# Altium PCB Double_H_Bridge_v1.0.PcbDoc
Units mm, origin at the board's own origin, x right, y up, seen from the top; angles counter-clockwise.
Board outline 55 x 55 mm, 2 copper layers (Top Layer, Bottom Layer); 107 components, 72 nets, 291 pads, 142 vias.
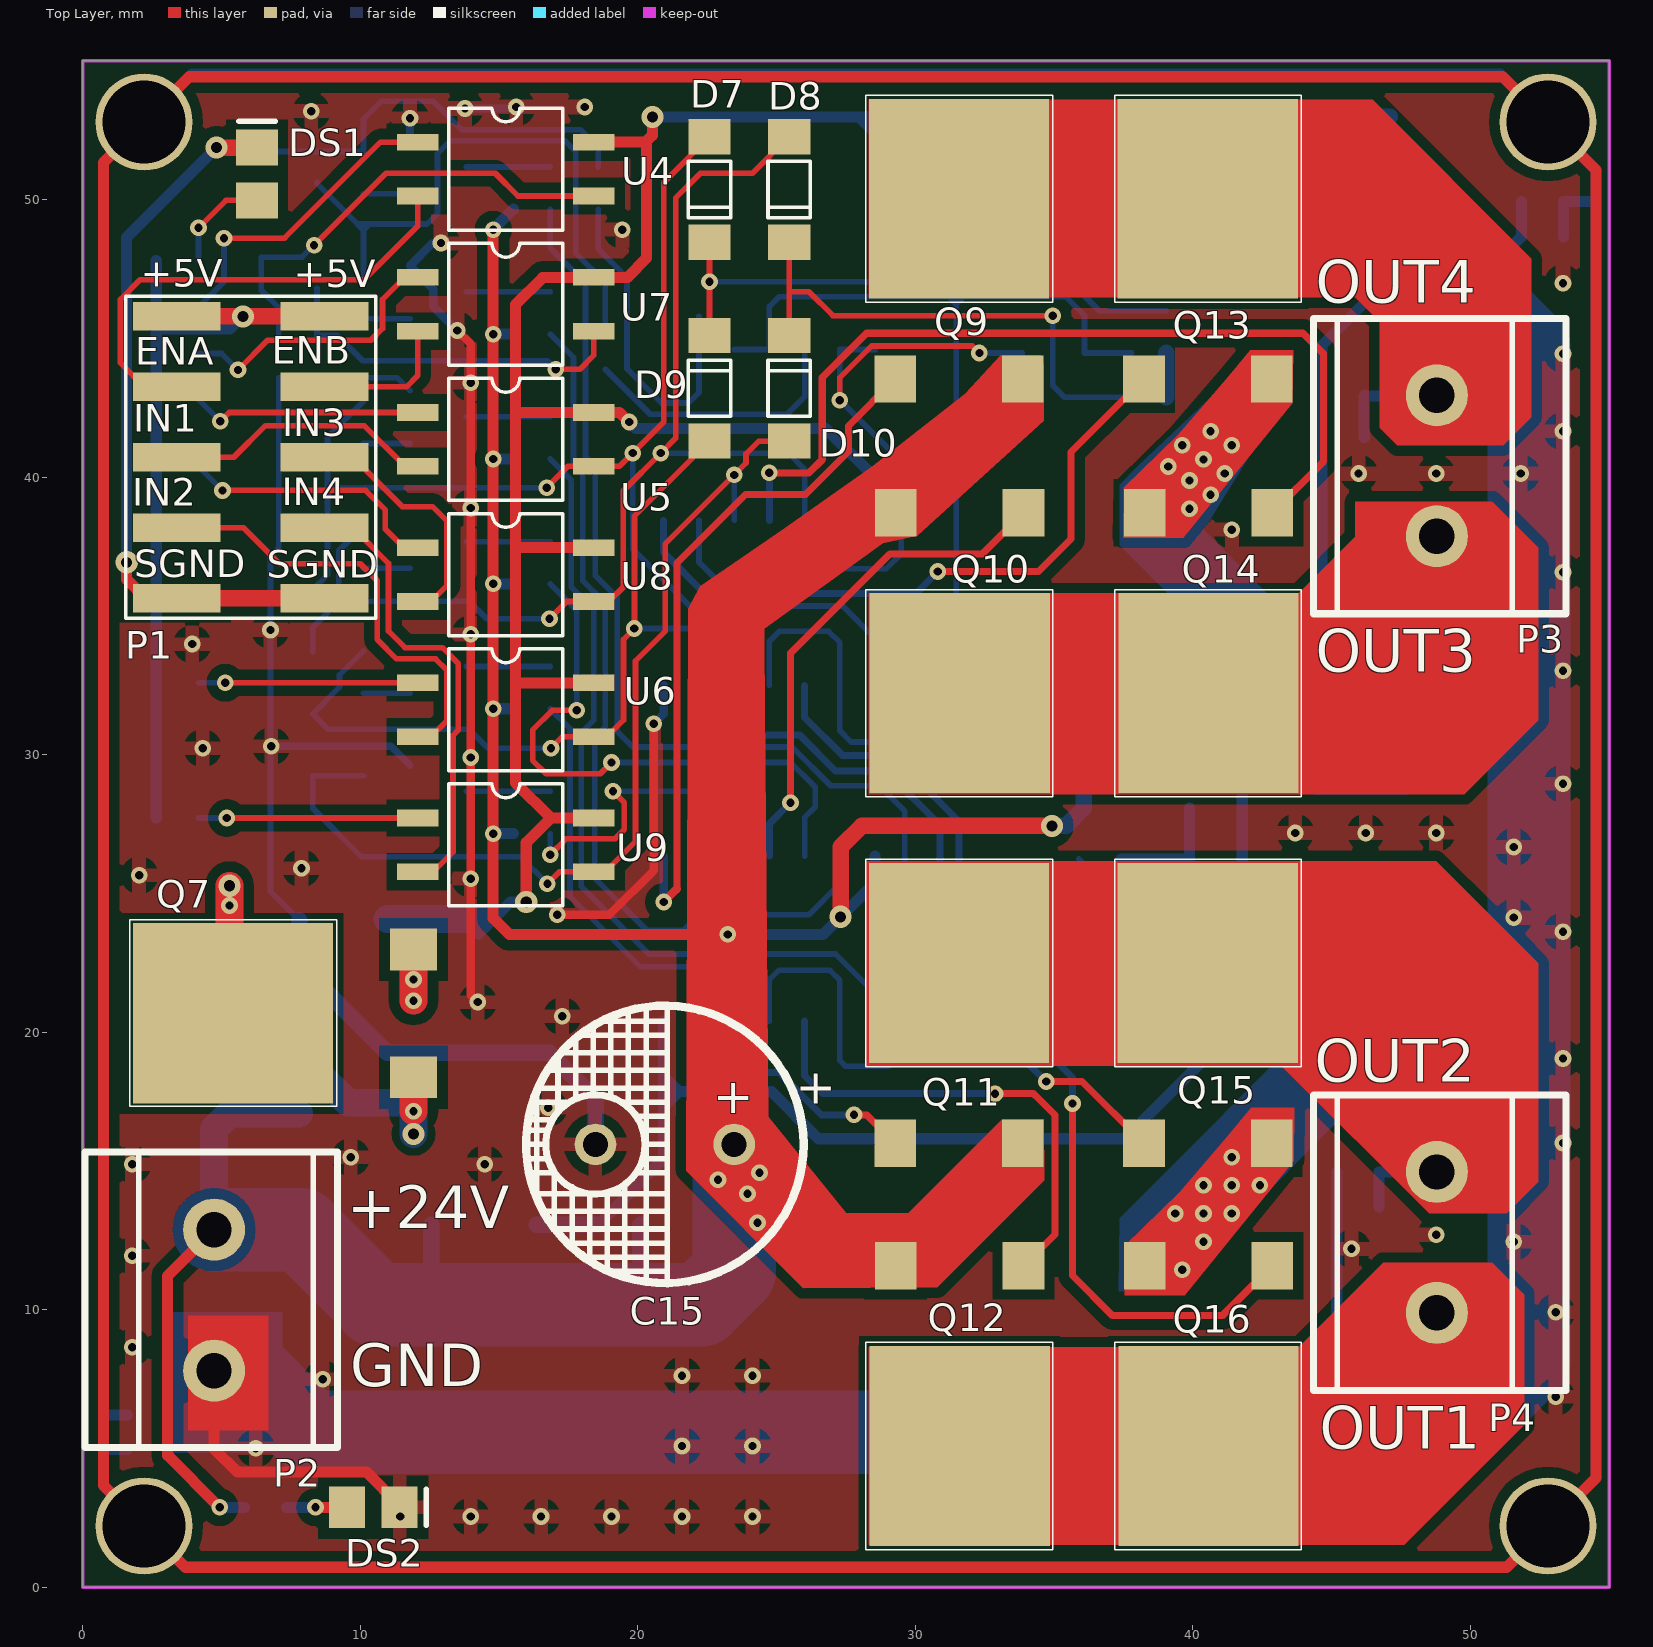
[diagram p0: Top Layer view]
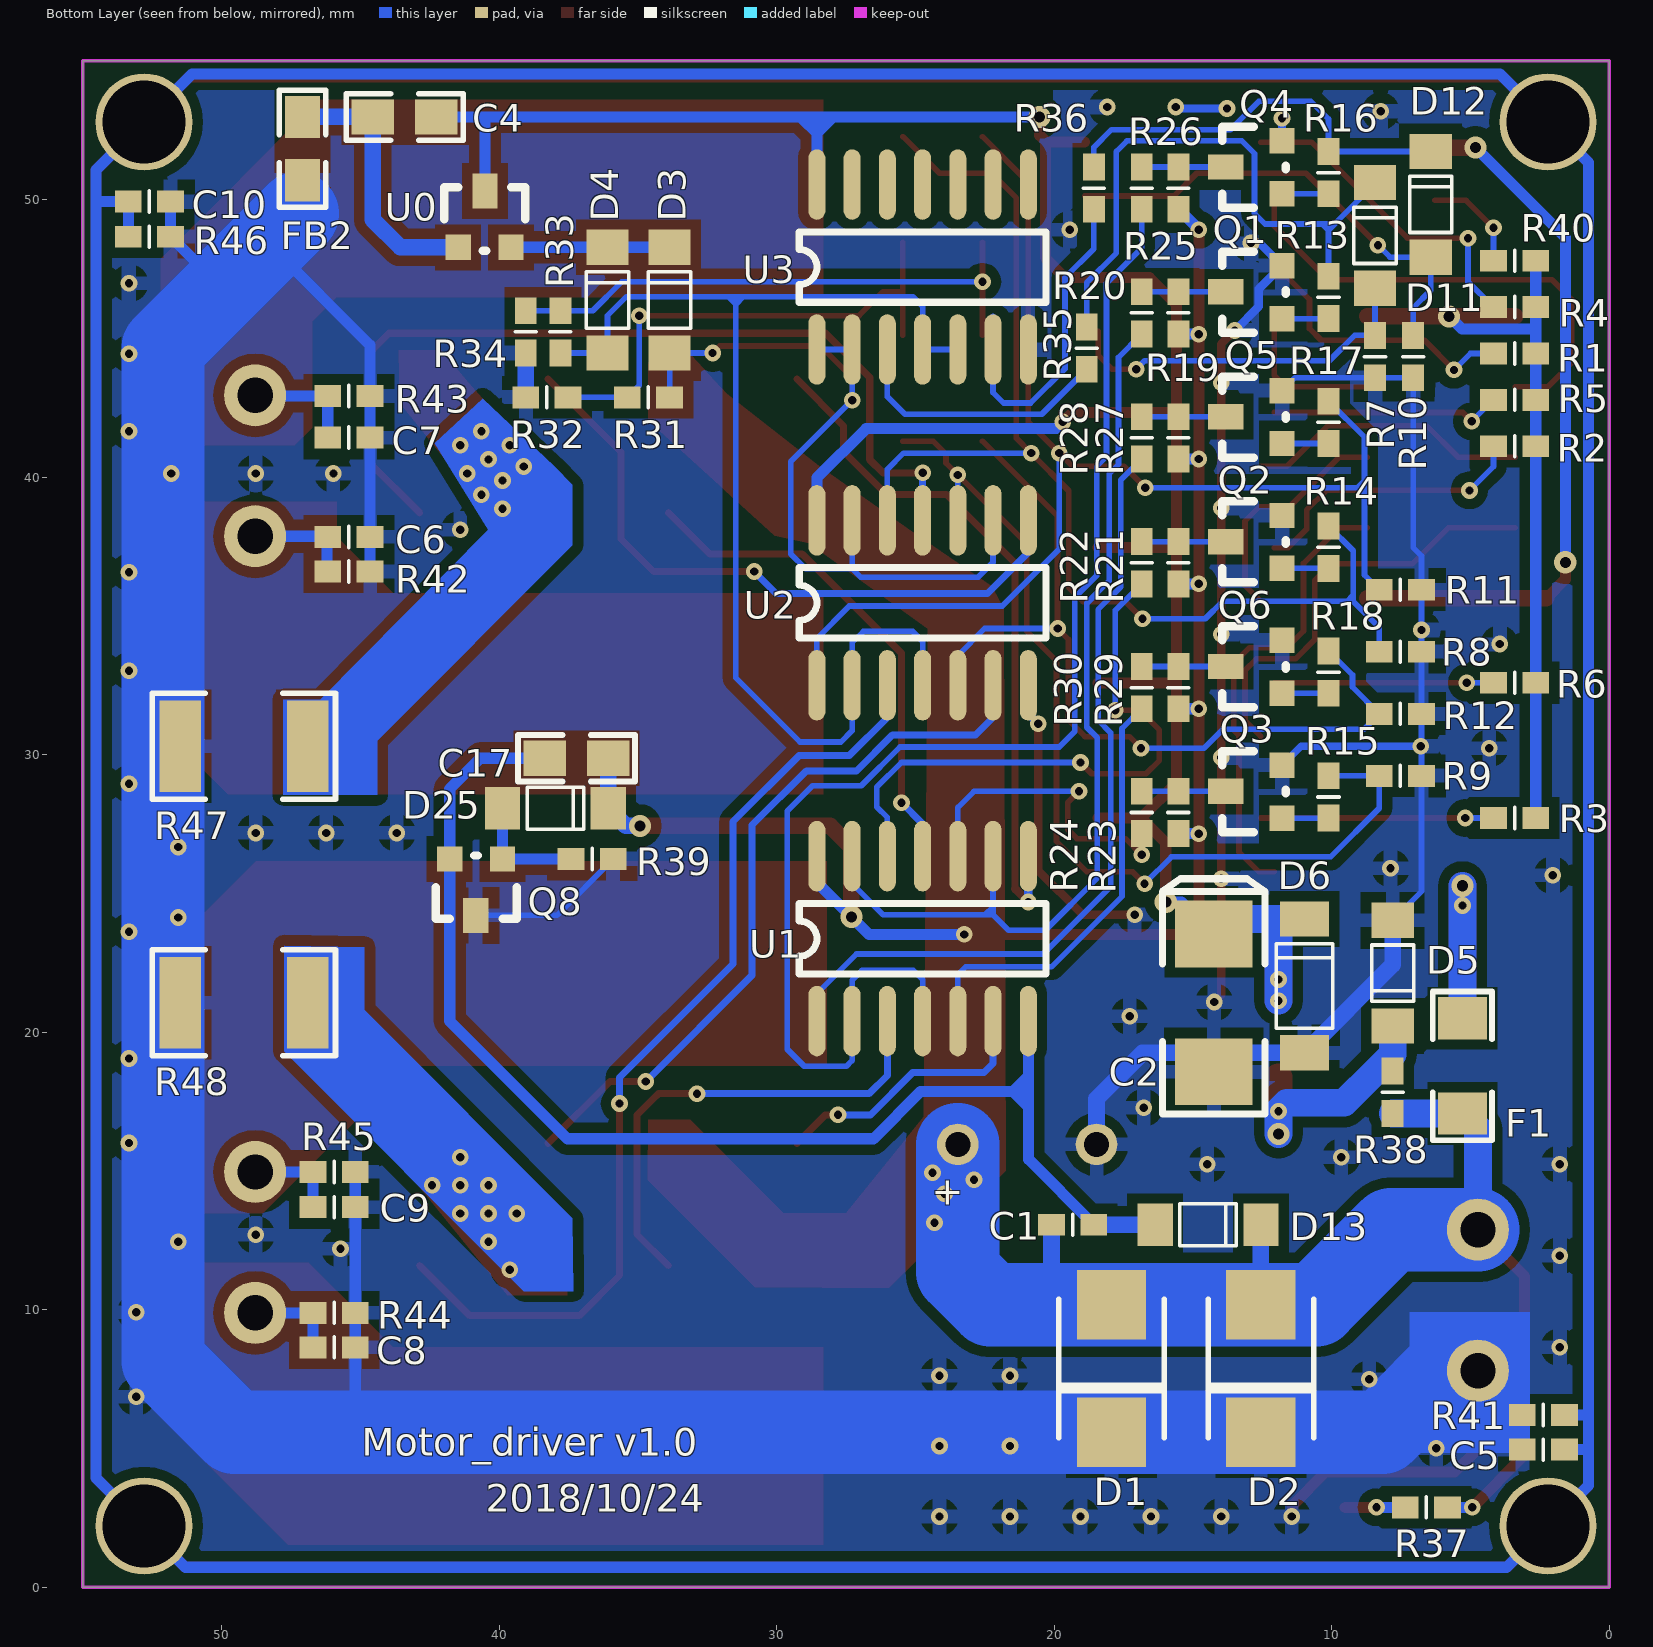
[diagram p1: Bottom Layer view, seen from below]

## Layer stack, top to bottom
Top Layer: signal copper 0.0356
Dielectric: dielectric 0.32, FR-4, Dk 4.8
Bottom Layer: signal copper 0.0356

## Board outline
0,0 55,0 55,55 0,55

## Design rules (kind name [scope] priority, off if disabled: settings)
Clearance Clearance_1 [inpoly] p1: gap=0.381
Clearance [All] p2: gap=0.203
Height [All] p1: minheight=0 maxheight=50 prefheight=12.7
HoleSize [All] p1: absolutevalues=TRUE maxlimit=4 minlimit=0.025 maxpercent=80.000 minpercent=20.000
MinimumSolderMaskSliver [All] p1: minsoldermaskwidth=0
PolygonConnect [All] p1: connectstyle=Relief reliefconductorwidth=0.508 reliefentries=4 polygonreliefangle="90 Angle"
RoutingVias [All] p1: holewidth=0.3 width=1.27 viastyle="Through Hole" minholewidth=0.3 minwidth=0.6 maxholewidth=0.711 maxwidth=1.27
SilkToSilkClearance [All] p1: silktosilkclearance=0
SilkscreenOverComponentPads [All] p1: minsilkscreentomaskgap=0
SolderMaskExpansion [All] p1: expansion=0.102
Width [All] p1: maxlimit=3 minlimit=0.203 preferedwidth=0.254
23 further rules are at their usual default settings.

## Components (designator, comment, footprint, x,y, rotation, side; value= is the part's Value field where it differs from the comment)
C1 "10nF" 0603 19.329,13.056 r180 bottom
C2 "100uF" CA6032-C 14.249,21.057 r90 bottom
C4 "10uF" 0805 43.409,52.984 r0 bottom
C5 "10nF" 0603 2.362,4.953 r0 bottom
C6 "10nF" 0603 45.415,37.846 r0 bottom
C7 "10nF" 0603 45.415,41.427 r0 bottom
C8 "10nF" 0603 45.949,8.636 r0 bottom
C9 "10nF" 0603 45.949,13.691 r0 bottom
C10 "10nF" 0603 52.603,49.936 r180 bottom
C15 "1000uF/35V" CAP-5mm 23.47,15.951 r180 top
C17 "22uF" 0805 37.211,29.87 r180 bottom
D1 "SMCJ24A" DO-214AA/SMB 17.932,7.874 r270 bottom
D2 "SMCJ24A" DO-214AA/SMB 12.548,7.874 r270 bottom
D3 "1N4148" DIDODE_LL-34 33.858,46.38 r90 bottom
D4 "1N4148" DIDODE_LL-34 36.093,46.38 r90 bottom
D5 "1N4148" DIDODE_LL-34 7.798,22.123 r270 bottom
D6 "SMAJ5.0A" Diode_TP2 10.973,19.253 r90 bottom
D7 "1N4148" DIDODE_LL-34 22.581,50.368 r270 top
D8 "1N4148" DIDODE_LL-34 25.451,50.368 r270 top
D9 "1N4148" DIDODE_LL-34 22.581,43.205 r90 top
D10 "1N4148" DIDODE_LL-34 25.451,43.205 r90 top
D11 "1N4148" DIDODE_LL-34 8.433,48.717 r90 bottom
D12 "1N4148" DIDODE_LL-34 6.426,49.835 r90 bottom
D13 "1N4148" DIDODE_LL-34 14.453,13.056 r180 bottom
D25 "1N4148" DIDODE_LL-34 37.973,28.067 r180 bottom
DS1 "GREEN" LED 6.274,50.927 r90 top
DS2 "GREEN" LED 10.465,2.87 r0 top
F1 "FUSE" 1206 5.283,20.498 r270 bottom
FB2 "FERRITE" 0805 47.092,51.841 r270 bottom
P1 "DH-10" DH2.54-10 6.045,40.716 r0 top locked
P2 "SH-2" J508-2(1) 4.724,10.338 r270 top
P3 "SH-2" J508-2(1) 48.793,40.411 r90 top locked
P4 "SH-2" J508-2(1) 48.793,12.421 r90 top
Q1 "MMBT3904" SOT-23 13.818,46.68 r90 bottom
Q2 "MMBT3904" SOT-23 13.818,37.678 r90 bottom
Q3 "MMBT3904" SOT-23 13.818,28.677 r90 bottom
Q4 "MMBT3904" SOT-23 13.818,51.181 r90 bottom
Q5 "MMBT3904" SOT-23 13.818,42.179 r90 bottom
Q6 "MMBT3904" SOT-23 13.818,33.177 r90 bottom
Q7 "2SD1760" TO-252-2L 8.661,20.676 r90 top
Q8 "MMBT2907A" 901X_SOT-23 40.843,24.206 r0 bottom
Q9 "SUD50P06" TO-252 31.572,50.038 r0 top
Q10 "SUD50P06" TO-252 31.598,32.218 r180 top
Q11 "SUD50P06" TO-252 31.572,22.494 r0 top
Q12 "SUD50P06" TO-252 31.598,5.08 r180 top
Q13 "NCE6075" TO-252 40.538,50.038 r0 top
Q14 "NCE6075" TO-252 40.564,32.218 r180 top
Q15 "NCE6075" TO-252 40.538,22.494 r0 top
Q16 "NCE6075" TO-252 40.564,5.08 r180 top
R1 "510R" 0603 3.404,44.458 r0 bottom
R2 "510R" 0603 3.404,41.114 r0 bottom
R3 "510R" 0603 3.404,27.716 r0 bottom
R4 "510R" 0603 3.404,46.131 r0 bottom
R5 "510R" 0603 3.404,42.786 r0 bottom
R6 "510R" 0603 3.404,32.588 r0 bottom
R7 "510R" 0603 8.433,44.348 r270 bottom
R8 "4.7K" 0603 7.518,33.706 r0 bottom
R9 "4.7K" 0603 7.518,29.235 r180 bottom
R10 "510R" 0603 7.061,44.348 r90 bottom
R11 "4.7K" 0603 7.518,35.941 r0 bottom
R12 "4.7K" 0603 7.518,31.471 r0 bottom
R13 "10K" 0603 10.109,46.477 r270 bottom
R14 "10K" 0603 10.109,37.475 r270 bottom
R15 "10K" 0603 10.109,28.473 r270 bottom
R16 "10K" 0603 10.109,50.978 r270 bottom
R17 "10K" 0603 10.109,41.976 r270 bottom
R18 "10K" 0603 10.109,32.974 r270 bottom
R19 "10K" 0603 15.519,45.918 r90 bottom
R20 "10K" 0603 16.84,45.918 r270 bottom
R21 "10K" 0603 15.519,36.916 r90 bottom
R22 "10K" 0603 16.84,36.916 r270 bottom
R23 "10K" 0603 15.519,27.915 r90 bottom
R24 "10K" 0603 16.84,27.915 r270 bottom
R25 "10K" 0603 15.519,50.419 r90 bottom
R26 "10K" 0603 16.84,50.419 r270 bottom
R27 "10K" 0603 15.519,41.417 r90 bottom
R28 "10K" 0603 16.84,41.417 r270 bottom
R29 "10K" 0603 15.519,32.415 r90 bottom
R30 "10K" 0603 16.84,32.415 r270 bottom
R31 "10K" 0603 34.62,42.875 r0 bottom
R32 "10K" 0603 38.278,42.875 r0 bottom
R33 "10K" 0603 37.795,45.237 r270 bottom
R34 "10K" 0603 39.04,45.237 r90 bottom
R35 "4.7K" 0603 18.821,44.653 r270 bottom
R36 "4.7K" 0603 18.567,50.419 r270 bottom
R37 "4.7K" 0603 6.579,2.87 r0 bottom
R38 "5.6K" 0603 7.798,17.831 r90 bottom
R39 "5.6K" 0603 36.652,26.238 r0 bottom
R40 "1K" 0603 3.404,47.803 r0 bottom
R41 "1M" 0603 2.362,6.198 r180 bottom
R42 "1M" 0603 45.415,36.601 r180 bottom
R43 "1M" 0603 45.415,42.926 r180 bottom
R44 "1M" 0603 45.949,9.881 r180 bottom
R45 "1M" 0603 45.949,14.961 r180 bottom
R46 "1M" 0603 52.603,48.666 r0 bottom
R47 "0.5R" 1812 49.2,30.302 r180 bottom
R48 "0.5R" 1812 49.2,21.057 r180 bottom
U0 "MAX809" SOT-23 40.513,50.317 r180 bottom
U1 "74VHC00" SO-14 28.55,20.396 r90 bottom locked
U2 "74HC08" SO-14 28.55,32.499 r90 bottom locked
U3 "74VHC00" SO-14 28.55,44.602 r90 bottom locked
U4 "EL357N" EL357N 15.24,51.105 r0 top
U5 "EL357N" EL357N 15.24,41.361 r0 top
U6 "EL357N" EL357N 15.24,31.618 r0 top
U7 "EL357N" EL357N 15.24,46.233 r0 top
U8 "EL357N" EL357N 15.24,36.49 r0 top
U9 "EL357N" EL357N 15.24,26.746 r0 top

## Footprints (in the part's own frame and the unit in brackets; to place one, negate y for a bottom-side part, rotate by r counter-clockwise, add the part's x,y. Pads: shape width x height; smd on the part's side, far side on the other; paste and mask are expansions set on the pad)
0603 [mil]
  rect 38x31 smd: 1(-30,0) 2(30,0)
  silkscreen extent 0,-15 0,15
0805 [mil]
  rect 60x50 smd: 1(-45,0) 2(45,0)
  silkscreen extent -83,-33 83,33, body extent -39,-25 39,24, height 18
901X_SOT-23 [mil]
  rect 36x50 smd: 1(0,0)
  rect 36x36 smd: 2(-38,-80) 3(37,-80)
  silkscreen extent -58,-85 57,5
1206 [mil]
  rect 60x70 smd: 1(0,0) 2(135,0)
  silkscreen extent -38,-42 173,42
1812 [mm]
  rect 1.5x3.3 smd: 1(-2.3,0) 2(2.3,0)
  silkscreen extent -3.3,-1.91 3.3,1.91
CA6032-C [mm]
  rect 2.4x2.8 smd: 1(2.48,0) 2(-2.48,0)
  silkscreen extent -4.01,-1.85 4.47,1.85, body extent -3.05,-1.68 3.05,1.67, height 2.7
CAP-5mm [mm]
  round 1.5 hole 0.9: 1(0,0) 2(5,0)
  silkscreen extent -2.5,-5 7.5,5
DH2.54-10 [mm]
  rect 3.17x1.02 smd: 1(-2.665,5.08) 2(2.665,5.08) 3(-2.665,2.54) 4(2.665,2.54) 5(-2.665,0) 6(2.665,0) 7(-2.665,-2.54) 8(2.665,-2.54) 9(-2.665,-5.08) 10(2.665,-5.08)
  silkscreen extent -4.5,-5.8 4.5,5.8
DIDODE_LL-34 [mil]
  rect 50x60 smd: 1(-75,0) 2(75,0)
  silkscreen extent -40,-30 40,30
Diode_TP2 [mil]
  rect 50x70 smd: 1(0,0) 2(190,0)
  silkscreen extent 35,-40 155,40
DO-214AA/SMB [mm]
  rect 2.5x2.5 smd: 1(-2.3,0) 2(2.3,0)
  silkscreen extent -2.5,-1.9 2.5,1.9
EL357N [mm]
  rect 1.5x0.6 smd: 1(-3.175,0.97) 2(-3.175,-0.97) 3(3.175,-0.97) 4(3.175,0.97)
  silkscreen extent -2.05,-2.2 2.05,2.2
J508-2(1) [mil]
  round 88 hole 50: 1(-100,0) 2(100,0)
  silkscreen extent -210,-183 209,175
LED [mm]
  rect 1.3x1.5 smd: 1(-0.95,0) 2(0.95,0)
  silkscreen extent 1.9,-0.65 1.9,0.65
SO-14 [mil]
  oval 100x24 smd: 1(0,0) 2(0,-50) 3(0,-100) 4(0,-150) 5(0,-200) 6(0,-250) 7(0,-300) 8(234,-300) 9(234,-250) 10(234,-200) 11(234,-150) 12(234,-100) 13(234,-50) 14(234,0)
  silkscreen extent 67,-325 167,25
SOT-23 [mil]
  rect 36x36 smd: 1(-38,-80) 2(37,-80)
  rect 36x50 smd: 3(0,0)
  silkscreen extent -58,-85 57,5
TO-252 [mm]
  rect 6.5x7.2 smd: 1(0,0)
  rect 1.5x1.7 smd: 2(-2.3,-6.5) 3(2.3,-6.5)
  silkscreen extent -3.35,-3.73 3.38,3.73
TO-252-2L [mm]
  rect 1.5x1.7 smd: 1(-2.3,-3.25) 3(2.3,-3.25)
  rect 6.5x7.2 smd: 2(0,3.25)
  silkscreen extent -3.35,-0.48 3.38,6.98

## Part data
C1 C4 C5 C6 C7 C8 C9 C10 C17: library part CAP, "电容"
C2: library part CapAEC*4
C15: library part "Cap Pol1", "Polarized Capacitor (Radial)"
D1 D2 D6: library part TVS
D3 D4 D5 D7 D8 D9 D10 D11 D12 D13 D25: library part Diode, "Default Diode"
DS1 DS2: library part LED2, "Typical RED, GREEN, YELLOW, AMBER GaAs LED"
F1: "保险丝"
Q1 Q2 Q3 Q4 Q5 Q6: library part S8050
Q8: library part PNP
Q9 Q10 Q11 Q12: library part MOSFET-P, "P-Channel MOSFET"
Q13 Q14 Q15 Q16: library part MOSFET-N, "N-Channel MOSFET"
R1 R2 R3 R4 R5 R6 R7 R8 R9 R10 R11 R12 R13 R14 R15 R16 R17 R18 R19 R20 R21 R22 R23 R24 R25 R26 R27 R28 R29 R30 R31 R32 R33 R34 R35 R36 R37 R38 R39 R40 R41 R42 R43 R44 R45 R46 R47 R48: library part RES, "电阻"
U4 U5 U6 U7 U8 U9: library part TLP521

## Free pads (board coordinates)
  round 3.5 hole 3: 0(2.2,2.2) 0(2.2,52.8) 0(52.8,2.2) 0(52.8,52.8)

## Via types
v1: diameter 0.6, hole 0.3, Top Layer to Bottom Layer, 133 vias
v2: diameter 0.8, hole 0.4, Top Layer to Bottom Layer, 9 vias

## Nets (pads, with @x,y where several pads share a name; then routed paths per layer and width w, separated by ;. In a path a pad name is that pad's centre, name@x,y a point inside that pad or via, vN(x,y) a via of type N, cw(c..) or ccw(c..) an arc to the next point about the centre after c; other vN are vias at no path point)
+5V: P1.1 P1.2 R1.1 R2.1 R3.1 R4.1 R5.1 R6.1 R40.1 | length 28.7
  Top Layer w0.6: P1.1 v2(5.766,45.796) P1.2
  Bottom Layer w0.4: R3.1 R6.1 R2.1 R5.1 R1.1 R4.1 R40.1 ; 2.713,45.334 5.303,45.334 v2(5.766,45.796)
+24V: C1.1 C15.1 C17.2 D1.1 D2.1 D13.2 D25.2 F1.2 P2.1 Q9.3 Q10.3 Q11.3 Q12.3 R19.1 R21.1 R23.1 R25.1 R27.1 R29.1 R37.1 R38.1 U1.14 | length 109.4
  Top Layer w0.4: P2.1 3.048,11.201 3.048,4.75 v1(4.928,2.87) ; v1(14.783,48.92) v1(14.783,45.156) v1(14.783,40.655) v1(14.783,36.154) v1(14.783,31.653) v1(14.783,27.153) 14.783,24.105 15.367,23.52 v1(23.241,23.52) ; Q12.3 Q12.3@29.458,11.58
  Top Layer w0.6: v2(27.305,24.155) 27.305,26.67 28.067,27.432 v2(34.925,27.432)
  Top Layer w1: Q9.3@33.872,43.292 Q9.3
  Bottom Layer w0.4: v1(4.928,2.87) R37.1 ; v1(14.783,27.153) R23.1 ; v1(14.783,31.653) R29.1 ; v1(14.783,36.154) R21.1 ; v1(14.783,40.655) R27.1 ; v1(14.783,45.156) R19.1 ; v1(14.783,48.92) R25.1 ; v1(23.241,23.52) 26.67,23.52 v2(27.305,24.155) 28.55,25.4 U1.14
  Bottom Layer w0.6: D2.1 D13.2 ; 20.091,10.174 C1.1 ; v2(34.925,27.432) 35.433,27.432 D25.2 C17.2
  Bottom Layer w1: P2.1 4.724,16.51 F1.2 R38.1
  Bottom Layer w3: P2.1 7.849,12.878 10.552,10.174 D2.1 D1.1 20.091,10.174 22.29,10.174 23.47,11.354 23.47,14.935 C15.1
  other v1: 24.308,13.132 23.952,14.173 22.885,14.681 24.384,14.935
EARTH: C5.1 C10.1 pad.0 R41.2 R46.2 | length 419.4
  Top Layer w0.4: 0.737,3.663 2.2,2.2 3.689,0.711 51.311,0.711 52.8,2.2 54.533,3.933 54.533,51.067 52.8,52.8 51.168,54.432 3.832,54.432 2.2,52.8 0.737,51.337 0.737,3.663
  Bottom Layer w0.4: 0.762,4.953 C5.1 ; 0.813,6.198 R41.2 ; R46.2 C10.1 54.533,49.936 ; 54.533,49.936 54.533,3.933 52.8,2.2 51.311,0.711 3.689,0.711 2.2,2.2 0.737,3.663 0.737,51.333 3.936,54.533 51.067,54.533 52.8,52.8 54.533,51.067 54.533,49.936
ENA: P1.3 U4.2 | length 17.6
  Top Layer w0.203: P1.3 2.21,43.256 1.346,44.12 1.346,46.406 2.057,47.117 10.135,47.117 12.065,49.047 U4.2
ENB: P1.4 U7.2 | length 5.1
  Top Layer w0.203: P1.4 11.659,43.256 12.065,43.663 U7.2
GND: C2.2 C5.2 C6.1 C7.1 C8.1 C9.1 C10.2 C15.2 D1.2 D2.2 D5.1 D6.1 DS2.2 FB2.2 P2.2 Q1.2 Q2.2 Q3.2 Q4.2 Q5.2 Q6.2 Q8.1 R7.2 R8.1 R9.2 R10.1 R11.1 R12.1 R32.2 R34.1 R39.1 R41.1 R42.2 R43.2 R44.2 R45.2 R46.1 R47.1 R48.1 U2.7 U3.7 | length 230
  Top Layer w0.3: v1(13.487,45.288) 13.981,44.795 v1(13.981,43.409) v1(13.981,38.887) v1(13.981,34.341) v1(13.981,29.896) v1(13.981,25.527) 13.981,21.325 v1(14.224,21.082) ; v1(17.094,24.232) 18.974,24.232 20.574,25.832 v1(20.574,31.115)
  Top Layer w0.4: P2.2 4.724,4.978 5.563,4.14 10.215,4.14 11.415,2.94 DS2.2
  Bottom Layer w0.203: D5.1 6.756,25.07 R9.2 6.756,30.328 R12.1 R8.1 v1(6.756,34.493) R11.1 6.756,37.16 7.061,37.465 R10.1 R7.2 11.318,43.586 Q5.2 ; D6.1 D6.1@11.116,19.11 ; R39.1 37.922,24.206 Q8.1
  Bottom Layer w0.254: v1@6.756,30.328 v1(6.782,30.302) 11.1,30.302 Q3.2
  Bottom Layer w0.3: Q4.2 v1(11.786,52.934) v1@11.786,52.984 ; v1(12.903,48.438) 12.603,48.438 Q1.2 12.624,46.782 12.624,46.152 v1(13.487,45.288) ; v1(13.767,53.289) 15.57,53.289 v1(15.621,53.34) ; v1(20.574,31.115) 20.93,31.471 U2.7
  Bottom Layer w0.4: C5.2 R41.1 P2.2 ; R42.2 C6.1 C7.1 R43.2 44.653,44.755 48.246,48.348 48.426,48.348 ; 45.187,5.574 C8.1 R44.2 C9.1 R45.2 ; 49.913,46.861 50.036,46.861 R46.1 C10.2
  Bottom Layer w0.6: D5.1 7.798,22.428 D6.1 16.815,19.253 18.47,17.598 C15.2 ; R32.2 R34.1
  Bottom Layer w3: P2.2 5.944,7.798 7.48,6.261 8.167,5.574 D2.2 D1.2 45.187,5.574 49.541,5.574 52.121,8.153 52.121,28.956 52.121,44.653 49.913,46.861 48.426,48.348 47.269,49.505
  other v1: 11.43,2.54 13.97,2.54 16.51,2.54 19.05,2.54 21.59,2.54 24.13,2.54 6.223,5.004 21.59,5.08 24.13,5.08 53.086,6.858 8.636,7.493 21.59,7.62 24.13,7.62 1.778,8.636 53.086,9.906 1.778,11.938 45.72,12.192 51.562,12.446 48.768,12.7 1.778,15.24 14.478,15.24 9.652,15.494 53.34,16.002 16.764,17.272 53.34,19.05 17.272,20.574 53.34,23.622 51.562,24.13 2.032,25.654 7.874,25.908 51.562,26.67 43.688,27.178 46.228,27.178 48.768,27.178 53.34,28.956 4.318,30.226 53.34,33.02 3.937,33.985 53.34,36.576 41.402,38.1 45.974,40.132 48.768,40.132 51.816,40.132 53.34,41.656 53.34,44.45 53.34,46.99 19.431,48.92 8.23,53.188 18.085,53.34
IN1: P1.5 U5.2 | length 10.2
  Top Layer w0.203: P1.5 5.436,40.716 6.579,41.859 10.135,41.859 11.602,40.391 U5.2 U5.2@12.548,40.391
IN2: P1.7 U6.2 | length 15.7
  Top Layer w0.203: P1.7 5.791,38.176 7.087,36.881 9.992,36.881 10.604,36.269 10.604,34.151 11.303,33.452 12.709,33.452 13.12,33.041 13.12,31.22 U6.2@12.548,30.648
IN3: P1.6 U8.2 | length 8.5
  Top Layer w0.203: P1.6 9.728,40.716 11.506,38.938 12.598,38.938 13.12,38.417 13.12,36.092 U8.2@12.548,35.52
IN4: P1.8 U9.2 | length 16.7
  Top Layer w0.203: P1.8 9.728,38.176 11.01,36.894 11.01,34.456 11.608,33.858 12.954,33.858 13.526,33.286 13.526,30.886 13.335,30.695 13.335,26.492 12.619,25.776 U9.2
M1_1: C8.2 P4.1 Q12.1 Q16.1 R44.1 | length 24.6
  Top Layer w0.4: Q12.1 Q16.1 47.6,5.08 48.793,6.274 P4.1
  Bottom Layer w0.4: C8.2 R44.1 P4.1
M1_2: C9.2 P4.2 Q11.1 Q15.1 R45.1 | length 24.3
  Top Layer w0.203: Q11.1 Q15.1 48.072,14.961 P4.2 P4.2@49.378,14.961
  Bottom Layer w0.4: C9.2 R45.1 P4.2
M2_1: C6.2 P3.1 Q10.1 Q14.1 R42.1 | length 24
  Top Layer w0.203: Q10.1 Q14.1 44.211,35.865 47.371,35.865 P3.1@49.378,37.871
  Bottom Layer w0.4: R42.1@46.203,36.627 46.203,37.871 P3.1
M2_2: C7.2 P3.2 Q9.1 Q13.1 R43.1 | length 27.5
  Top Layer w0.203: Q9.1 Q13.1 46.761,50.038 49.378,47.422 P3.2@49.378,42.951
  Bottom Layer w0.4: C7.2 R43.1 ; R43.1@46.203,42.951 R43.1 ; P3.2 48.768,42.926 R43.1
NetC4_2: C4.2 FB2.1 U0.1 | length 9.7
  Bottom Layer w0.6: U0.1 43.561,48.285 44.552,49.276 C4.2 FB2.1
NetD3_1: D3.1 R31.1 U2.9 U2.13 U3.1 U3.2 | length 30.2
  Top Layer w0.203: v1(27.28,42.774) 27.28,43.586 28.423,44.729 32.055,44.729 v1(32.309,44.475)
  Bottom Layer w0.203: U2.9 22.2,36.932 22.733,36.398 26.975,36.398 27.28,36.703 ; U2.13 27.28,36.703 ; U3.1 U3.2 v1(27.28,42.774) 29.489,40.564 29.489,37.236 28.956,36.703 27.28,36.703 ; v1(32.309,44.475) D3.1 R31.1
NetD3_2: D3.2 D4.2 U0.2 | length 5.7
  Bottom Layer w0.4: D3.2 D4.2 U0.2
NetD4_1: D4.1 R33.2 U2.2 U2.4 U3.4 U3.5 | length 45.1
  Bottom Layer w0.203: U3.5 U3.4 24.74,46.152 25.095,46.507 31.75,46.507 ; U2.4 24.74,34.087 25.095,34.442 26.873,34.442 27.28,34.036 U2.2 27.28,30.861 27.686,30.455 29.159,30.455 31.471,32.766 31.471,46.507 ; 31.191,46.507 31.471,46.228 31.75,46.507 ; R33.2 D4.1 36.093,45.822 35.408,46.507 31.75,46.507
NetD5_2: D5.2 Q7.1 R38.2 | length 8.8
  Top Layer w1: v1(11.911,17.146) Q7.1
  Bottom Layer w0.203: R38.2 8.407,18.593 8.611,18.593
  Bottom Layer w1: D5.2 7.798,19.202 8.407,18.593 9.55,17.45 11.608,17.45 v1(11.911,17.146) v2(11.911,16.331)
NetD7_1: D7.1 R11.2 R17.1 U2.1 U5.3 | length 47.5
  Top Layer w0.203: v1(16.713,39.624) 17.481,40.391 U5.3 19.335,40.391 v1(19.812,40.869) 20.93,41.986 20.93,50.622 D7.1
  Bottom Layer w0.203: R11.2 8.814,36.474 8.814,41.443 R17.1 ; 8.814,39.37 9.068,39.624 ; 8.814,39.878 9.068,39.624 ; 8.839,39.624 9.068,39.624 ; v1(16.713,39.624) 9.068,39.624 ; v1(19.812,40.869) 19.812,37.414 21.869,35.357 27.381,35.357 28.55,34.188 U2.1
NetD7_2: D7.2 D9.2 R33.1 R34.2 | length 20.2
  Top Layer w0.203: D9.2 v1(22.581,47.038) D7.2
  Bottom Layer w0.203: v1(22.581,47.038) 35.589,47.038 36.627,45.999 R33.1 R34.2
NetD8_1: D8.1 R8.2 R14.1 U2.12 U8.3 | length 43.7
  Top Layer w0.203: v1(16.815,34.9) 17.435,35.52 U8.3 18.959,35.52 19.47,36.031 19.47,39.51 v1(20.828,40.869) 21.361,41.402 21.361,50.063 22.25,50.952 24.13,50.952 D8.1
  Bottom Layer w0.203: R8.2 8.28,34.585 9.22,35.525 ; 9.22,35.753 9.449,35.525 ; R14.1 9.22,37.348 9.22,35.89 9.22,35.525 ; v1(16.815,34.9) 14.554,34.9 13.929,35.525 9.449,35.525 ; v1(20.828,40.869) 25.425,40.869 26.01,40.284 U2.12 ; 9.22,35.525 9.449,35.525
NetD8_2: D8.2 D10.2 R31.2 R32.1 | length 18.5
  Top Layer w0.203: D10.2 25.451,46.685 ; D8.2 25.451,46.685 ; v1(34.95,45.822) 27.026,45.822 26.162,46.685 25.451,46.685
  Bottom Layer w0.203: v1(34.95,45.822) 34.95,43.307 R31.2 R32.1
NetD9_1: D9.1 R12.2 R18.1 U2.5 U6.3 | length 32.2
  Top Layer w0.203: v1(16.866,30.226) 17.288,30.648 U6.3 ; U6.3@17.77,30.648 U6.3 ; D9.1 19.876,38.596 19.876,34.544 19.482,34.15 19.482,31.242 18.888,30.648 U6.3
  Bottom Layer w0.203: R18.1 9.246,32.873 9.246,32.436 R12.2 8.839,30.912 13.919,30.912 14.605,30.226 v1(16.866,30.226) ; v1(19.863,34.544) 22.504,34.544 23.47,33.579 U2.5
NetD10_1: D10.1 R9.1 R15.1 U2.10 U9.3 | length 35.4
  Top Layer w0.203: v1(16.739,25.349) 17.166,25.776 U9.3 18.817,25.776 19.914,26.873 19.914,33.376 20.98,34.442 20.98,37.592 v1(23.47,40.081) 23.898,40.51 23.898,40.84 24.359,41.3 D10.1
  Bottom Layer w0.203: R15.1 R9.1 8.28,28.067 10.033,26.314 15.773,26.314 v1(16.739,25.349) ; U2.10 v1(23.47,40.081)
NetD11_1: D11.1 R7.1 U7.3 | length 13.3
  Top Layer w0.203: v1(17.043,43.891) 17.907,43.891 18.415,44.399 U7.3
  Bottom Layer w0.203: D11.1 R7.1 9.169,45.11 10.084,44.196 16.739,44.196 v1(17.043,43.891)
NetD11_2: D11.2 R13.1 R35.1 | length 22
  Bottom Layer w0.203: D11.2 8.433,50.585 9.894,49.124 ; R13.1 10.109,48.895 ; 10.109,48.908 10.109,48.895 ; R35.1 18.821,47.015 17.755,48.082 17.755,51.74 17.374,52.121 13.234,52.121 12.776,51.663 12.776,49.505 12.395,49.124 10.363,49.124 ; 9.894,49.124 9.894,49.11 10.109,48.895 ; 9.894,49.124 10.109,49.124 ; 10.109,48.895 10.338,49.124 10.363,49.124 ; 10.109,48.895 10.109,49.124 ; 10.109,49.124 10.363,49.124
NetD12_1: D12.1 R10.2 U4.3 | length 17.1
  Top Layer w0.203: v1(8.329,48.359) 10.922,50.952 14.859,50.952 15.677,50.135 U4.3 U4.3@18.898,50.135
  Bottom Layer w0.203: R10.2 7.061,46.101 6.426,46.736 D12.1 7.899,47.93 v1(8.329,48.359)
NetD12_2: D12.2 R16.1 R36.1 | length 14.6
  Bottom Layer w0.203: D12.2@6.756,51.74 R16.1 10.109,52.908 10.744,53.543 12.624,53.543 13.64,52.527 17.932,52.527 18.567,51.892 R36.1
NetD25_1: D25.1 Q8.2 R39.2 | length 4.3
  Bottom Layer w0.4: R39.2 Q8.2 D25.1
NetDS1_1: DS1.1 R40.2 | length 3.7
  Top Layer w0.203: v1(4.166,48.986) 5.156,49.977 DS1.1
  Bottom Layer w0.203: R40.2 v1(4.166,48.986)
NetDS2_1: DS2.1 R37.2 | length 2.2
  Top Layer w0.4: v1(8.382,2.87) DS2.1
  Bottom Layer w0.4: R37.2 v1(8.382,2.87)
NetF1_1: F1.1 Q7.2 | length 9.2
  Top Layer w1: Q7.2@5.283,20.804 v1(5.283,24.562) v2(5.283,25.273)
  Bottom Layer w1: F1.1 v1(5.283,24.562) v2(5.283,25.273)
NetQ1_1: Q1.1 R13.2 | length 1.7
  Bottom Layer w0.203: R13.2 Q1.1
NetQ1_3: Q1.3 R19.2 R20.1 | length 3
  Bottom Layer w0.203: Q1.3 R19.2 R20.1
NetQ2_1: Q2.1 R14.2 | length 1.7
  Bottom Layer w0.203: R14.2 Q2.1
NetQ2_3: Q2.3 R21.2 R22.1 | length 3
  Bottom Layer w0.203: Q2.3 R21.2 R22.1
NetQ3_1: Q3.1 R15.2 | length 1.7
  Bottom Layer w0.203: R15.2 Q3.1
NetQ3_3: Q3.3 R23.2 R24.1 | length 3
  Bottom Layer w0.203: Q3.3 R23.2 R24.1
NetQ4_1: Q4.1 R16.2 | length 1.7
  Bottom Layer w0.203: R16.2 Q4.1
NetQ4_3: Q4.3 R25.2 R26.1 | length 3
  Bottom Layer w0.203: Q4.3 R25.2 R26.1
NetQ5_1: Q5.1 R17.2 | length 1.7
  Bottom Layer w0.203: R17.2 Q5.1
NetQ5_3: Q5.3 R27.2 R28.1 | length 3
  Bottom Layer w0.203: Q5.3 R27.2 R28.1
NetQ6_1: Q6.1 R18.2 | length 1.7
  Bottom Layer w0.203: R18.2 Q6.1
NetQ6_3: Q6.3 R29.2 R30.1 | length 3
  Bottom Layer w0.203: Q6.3 R29.2 R30.1
NetQ13_3: Q13.3 Q14.3 R47.2 | length 0.2
  Top Layer w0.4: Q13.3@42.838,43.292 Q13.3
  other v1: 39.878,38.862 40.64,39.37 39.878,39.878 41.148,40.132 39.116,40.386 40.386,40.64 39.624,41.148 41.402,41.148 40.64,41.656
NetQ15_3: Q15.3 Q16.3 R48.2
  other v1: 39.624,11.43 40.386,12.446 39.37,13.462 40.386,13.462 41.402,13.462 40.386,14.478 41.402,14.478 42.418,14.478 41.402,15.494
NetR1_2: R1.2 U7.1 | length 10.1
  Top Layer w0.203: v1(5.588,43.866) 6.655,44.933 10.373,44.933 10.795,45.355 10.795,46.406 11.592,47.203 U7.1
  Bottom Layer w0.203: R1.2 4.995,44.458 v1(5.588,43.866)
NetR2_2: R2.2 U8.1 | length 10.2
  Top Layer w0.203: v1(5.029,39.522) 10.185,39.522 10.897,38.811 10.897,38.125 11.562,37.46 U8.1
  Bottom Layer w0.203: R2.2 4.166,40.386 v1(5.029,39.522)
NetR3_2: R3.2 U9.1 | length 8.4
  Top Layer w0.203: v1(5.182,27.716) U9.1 U9.1@12.548,27.716
  Bottom Layer w0.203: R3.2 v1(5.182,27.716)
NetR4_2: R4.2 U4.1 | length 11.8
  Top Layer w0.203: v1(5.08,48.616) 7.264,48.616 10.724,52.075 U4.1 U4.1@12.548,52.075
  Bottom Layer w0.203: R4.2 5.08,47.045 v1(5.08,48.616)
NetR5_2: R5.2 U5.1 | length 8.4
  Top Layer w0.203: v1(4.953,42.012) 5.273,42.331 U5.1
  Bottom Layer w0.203: R5.2 4.178,42.786 v1(4.953,42.012)
NetR6_2: R6.2 U6.1 | length 7.9
  Top Layer w0.203: v1(5.131,32.588) U6.1
  Bottom Layer w0.203: R6.2 v1(5.131,32.588)
NetR20_2: R20.2 U1.9 U1.13 | length 34.4
  Bottom Layer w0.203: R20.2 17.678,44.318 17.678,40.462 18.009,40.132 18.009,36.271 18.821,35.458 18.821,30.988 18.44,30.607 18.44,25.552 20.32,23.673 21.641,23.673 22.2,24.232 ; U1.9 22.2,24.511 ; 22.479,24.232 22.2,24.511 ; U1.13 27.28,25.349 26.162,24.232 22.2,24.232 ; 22.2,24.232 22.2,24.511
NetR22_2: R22.2 U1.12 | length 21.6
  Top Layer w0.203: v1(17.793,31.598) 16.916,31.598 16.205,30.886 16.205,29.794 16.688,29.312 18.644,29.312 v1(19.05,29.718) ; v1@17.829,31.562 17.864,31.598 v1@17.894,31.598 ; v1@17.875,31.617 v1@17.882,31.623
  Bottom Layer w0.203: R22.2 17.793,35.202 v1(17.793,31.598) ; v1(19.05,29.718) 25.502,29.718 26.391,28.829 26.391,28.118 26.01,27.737 U1.12
NetR24_2: R24.2 U1.10 | length 11.7
  Top Layer w0.203: v1(16.84,26.391) 17.424,26.975 19.177,26.975 19.507,27.305 19.507,28.27 v1(19.101,28.677)
  Bottom Layer w0.203: v1(16.84,26.391) R24.2 ; v1(19.101,28.677) 22.885,28.677 23.47,28.092 U1.10
NetR26_2: R26.2 U1.2 U1.4 | length 49.8
  Bottom Layer w0.203: R26.2 16.84,48.26 18.11,46.99 18.11,40.742 18.466,40.386 18.466,36.449 19.253,35.662 19.253,30.836 19.812,30.277 25.552,30.277 26.949,28.88 28.702,28.88 29.616,27.965 29.616,19.38 29.007,18.771 27.483,18.771 27.28,18.974 U1.2 27.28,21.869 26.924,22.225 25.07,22.225 24.74,21.895 U1.4
NetR28_2: R28.2 U1.1 | length 29.4
  Bottom Layer w0.203: R28.2 17.597,39.898 17.597,36.048 18.415,35.23 18.415,31.242 17.958,30.785 17.958,25.248 20.39,22.816 27.121,22.816 28.55,21.387 U1.1
NetR30_2: R30.2 U1.5 | length 15.8
  Bottom Layer w0.203: R30.2 17.551,30.942 17.551,24.892 20.091,22.352 23.19,22.352 23.47,22.073 U1.5
NetR35_2: R35.2 U3.3 | length 9.8
  Bottom Layer w0.203: R35.2 20.447,42.266 25.375,42.266 26.01,42.901 U3.3
NetR36_2: R36.2 U3.6 | length 12.2
  Bottom Layer w0.203: R36.2 18.567,48.235 19.609,47.193 19.609,43.907 20.844,42.672 21.819,42.672 22.2,43.053 U3.6 U3.6@22.2,45.796
REFER: C1.2 C17.1 D13.1 Q8.3 U1.7 | length 47.6
  Bottom Layer w0.4: C1.2 20.93,15.418 U1.7 ; 20.93,17.296 21.488,17.854 ; 20.93,18.413 21.488,17.854 ; 20.979,17.854 21.488,17.854 ; C17.1 40.665,29.87 41.783,28.753 Q8.3 41.783,20.396 37.541,16.154 26.518,16.154 24.818,17.854 21.488,17.854
  Bottom Layer w0.6: D13.1 C1.2
SGND: DS1.2 P1.9 P1.10 | length 25.8
  Top Layer w0.4: v2(1.575,36.932) 1.575,36.322 P1.9@2.261,35.636
  Top Layer w0.6: P1.9@2.261,35.636 P1.9 P1.10 ; v2(4.816,51.877) DS1.2
  Bottom Layer w0.4: v2(1.575,36.932) 1.575,48.636 v2(4.816,51.877)
SWITCH_11: Q10.2 U1.11 | length 18.1
  Top Layer w0.254: v1(25.502,28.27) 25.502,33.655 29.078,37.232 32.411,37.232 Q10.2
  Bottom Layer w0.254: U1.11 24.74,27.508 v1(25.502,28.27)
SWITCH_12: Q14.2 U2.11 | length 33.5
  Top Layer w0.254: v1(24.74,40.157) 26.172,40.157 26.645,40.63 26.645,43.586 28.245,45.187 43.967,45.187 44.704,44.45 44.704,40.558 Q14.2
  Bottom Layer w0.254: U2.11@24.74,39.649 U2.11 v1(24.74,40.157)
SWITCH_13: Q9.2 U1.8 | length 26.2
  Top Layer w0.254: 21.412,25.119 21.412,25.171 21.412,36.906 23.876,39.37 26.035,39.37 27.584,40.919 27.584,41.85 Q9.2
  Top Layer w0.3: v1(20.93,24.689) 21.412,25.171
  Bottom Layer w0.254: U1.8@20.93,25.425 U1.8
  Bottom Layer w0.3: v1(20.93,24.689) U1.8
SWITCH_14: Q13.2 U2.8 | length 24.1
  Top Layer w0.254: v1(30.81,36.601) 34.442,36.601 35.611,37.77 35.611,40.91 Q13.2
  Bottom Layer w0.254: U2.8 20.93,37.287 22.403,35.814 30.023,35.814 v1(30.81,36.601)
SWITCH_21: Q12.2 U1.3 | length 17.5
  Top Layer w0.254: v1(32.868,17.78) 34.262,17.78 34.452,17.59 34.454,17.59 35.027,17.018 35.027,12.709 Q12.2
  Bottom Layer w0.254: U1.3 26.01,18.44 26.67,17.78 v1(32.868,17.78)
SWITCH_22: Q16.2 U2.3 | length 34.9
  Top Layer w0.254: v1(35.662,17.424) 35.662,11.227 37.109,9.779 41.063,9.779 Q16.2
  Bottom Layer w0.254: U2.3 26.01,31.344 27.381,29.972 29.185,29.972 31.572,27.584 31.572,22.454 35.662,18.364 v1(35.662,17.424)
SWITCH_23: Q11.2 U1.6 | length 9.8
  Top Layer w0.254: v1(27.788,17.018) 28.248,17.018 Q11.2
  Bottom Layer w0.254: U1.6 22.2,18.872 22.53,18.542 25.095,18.542 26.619,17.018 v1(27.788,17.018)
SWITCH_24: Q15.2 U2.6 | length 26.7
  Top Layer w0.254: v1(34.713,18.22) 36.012,18.22 Q15.2
  Bottom Layer w0.254: U2.6 22.2,31.344 22.835,30.709 25.832,30.709 27.127,29.413 28.931,29.413 30.886,27.457 30.886,22.047 v1(34.713,18.22)
VDD: C2.1 C4.1 D6.2 Q7.3 U0.3 U2.14 U3.14 U4.4 U5.4 U6.4 U7.4 U8.4 U9.4 | length 95.6
  Top Layer w0.4: 15.804,37.46 U8.4 ; 15.814,42.331 U5.4 19.34,42.331 v1(19.685,41.986) ; v2(15.977,24.689) 15.977,26.832 16.861,27.716 ; U9.4 16.861,27.716 ; U6.4 15.596,32.588 ; U4.4@18.898,52.075 20.274,52.075 ; v2(20.523,52.984) 20.523,52.324 20.274,52.075 ; 15.596,32.588 15.596,28.981 16.861,27.716 ; 15.596,32.588 15.596,46.228 16.571,47.203 U7.4 19.619,47.203 20.312,47.896 20.312,52.037 20.274,52.075
  Top Layer w1: v1(11.913,21.133) v1(11.911,21.895) Q7.3
  Bottom Layer w0.4: C2.1 15.402,24.689 v2(15.977,24.689) ; v1(19.685,41.986) 19.91,41.761 26.768,41.761 28.55,39.98 U2.14 ; v2(20.523,52.984) 28.55,52.984 ; 27.965,52.984 28.55,52.4 ; U3.14 28.55,52.4 ; 29.083,52.934 28.55,52.4 ; U0.3@40.284,50.546 U0.3 40.513,52.934 ; C4.1 28.55,52.984 ; 28.55,52.4 28.55,52.984
  Bottom Layer w0.6: D6.2@10.973,24.061 D6.2@10.982,24.07
  Bottom Layer w1: D6.2 14.24,24.079 C2.1@14.249,24.07 ; 11.887,24.07 11.913,24.045 v1(11.913,21.133)
pads on no net: U3.8 U3.9 U3.10 U3.11 U3.12 U3.13

## Polygon pours and split planes (outlines as drawn)
GND on Top Layer "Top Layer-No Net" (solid, remove dead copper, pour order 1000): 0,55 0,0 55,0 55,55
GND on Bottom Layer "Top Layer-No Net" (solid, remove dead copper, pour order 1001): 0,55 0,0 55,0 55,55

## Keep-outs
Keep-Out Layer:
  the board outline again, w0.127

## Other copper
Top Layer:
  rectangle net GND: 3.785,5.639 6.68,9.779
  region net NetQ15_3: 42.113,17.272 41.25,16.231 39.522,14.224 37.567,12.319 37.541,10.516 39.7,10.516 43.637,15.367 43.663,17.272
  region net NetQ13_3: 42.062,44.577 41.199,43.536 39.472,41.529 37.516,39.624 37.49,37.821 39.649,37.821 43.586,42.672 43.612,44.577
  region net +24V: 21.819,35.255 22.25,36.068 25.298,38.151 28.473,40.411 31.801,43.002 33.071,44.399 34.519,44.399 34.62,44.069 34.62,42.037 30.074,37.897 28.829,37.617 24.562,34.544 24.562,33.934 24.689,16.942 27.508,13.462 29.743,13.462 33.122,16.84 34.62,16.84 34.646,14.656 30.785,10.795 25.959,10.77 21.742,15.011
  region net M1_2: 28.194,26.162 28.194,18.796 43.18,18.796 48.514,13.462 51.308,13.462 52.451,14.605 52.451,22.479 48.768,26.162
  region net M1_1: 28.321,8.636 28.321,1.524 47.625,1.524 51.943,5.842 51.943,10.541 50.8,11.684 46.863,11.684 43.815,8.636
  region net M2_1: 28.321,28.575 49.784,28.575 52.451,31.242 52.451,37.465 50.8,39.116 45.847,39.116 45.847,37.846 43.815,35.814 28.321,35.814
  region net M2_2: 28.321,53.594 28.321,46.482 45.847,46.482 46.736,45.593 46.736,41.783 47.371,41.148 51.181,41.148 52.197,42.164 52.197,47.879 46.482,53.594
Bottom Layer:
  rectangle net GND: 2.845,4.826 7.188,9.906
  pour cut-out: 20.041,54.077 20.035,54.071 20.035,53.594 20.576,53.594 20.727,53.745 20.701,53.771 20.701,54.204
  region net NetQ13_3: 47.777,28.55 44.399,28.55 44.399,30.505 37.363,37.541 37.363,39.726 38.024,40.386 40.589,42.824 42.316,41.224 40.386,38.1 46.457,31.979 47.777,31.979
  region net NetQ15_3: 47.752,19.304 39.116,10.668 37.338,10.668 37.363,13.284 44.856,20.803 44.856,23.063 47.752,23.114

## Silkscreen, mask and mechanical layers (free items; w line width, h text height)
Top Overlay:
  text "+5V" at 2.083,46.863 h1
  text "+5V" at 7.595,46.838 h1
  text "OUT4" at 44.425,46.279 h1.52
  text "ENB" at 6.807,44.094 h1
  text "ENA" at 1.88,44.044 h1
  text "IN1" at 1.803,41.631 h1
  text "IN3" at 7.188,41.478 h1
  text "IN4" at 7.163,38.989 h1
  text "IN2" at 1.778,38.964 h1
  text "SGND" at 1.854,36.398 h1
  text "SGND" at 6.629,36.373 h1
  text "OUT3" at 44.425,32.995 h1.52
  text "OUT2" at 44.399,18.212 h1.52
  text "+24V" at 9.525,12.929 h1.52
  text "GND" at 9.627,7.239 h1.52
  text "OUT1" at 44.577,4.978 h1.52
Bottom Overlay:
  text "Motor_driver v1.0" at 44.958,4.724 h1
  text "2018/10/24" at 40.488,2.718 h1
Top Solder:
  region: 21.819,35.255 25.4,37.897 28.55,40.335 31.852,42.926 33.071,44.399 34.519,44.399 34.62,44.069 34.569,41.732 30.048,37.821 25.908,34.773 24.613,33.528 24.689,16.942 27.508,13.462 29.743,13.462 33.122,16.84 34.62,16.84 34.646,14.656 30.785,10.795 25.959,10.77 21.742,15.011
  region: 42.113,17.272 41.25,16.231 39.522,14.224 37.567,12.319 37.541,10.516 39.7,10.516 43.637,15.367 43.663,17.272
  region: 42.062,44.577 41.199,43.536 39.472,41.529 37.516,39.624 37.49,37.821 39.649,37.821 43.586,42.672 43.612,44.577

## Dimensions
0,0 to 0,55 on Top Overlay
0,0 to 55,0 on Top Overlay

## Text inside footprints (layer, text, board x,y; h text height)
C15: Top Overlay "+" at 24.181,18.161 h1.27 r180; Top Overlay "+" at 27.153,18.491 h1.27 r180; Bottom Overlay "+" at 23.259,14.649 h1.02 r180